# EAGLE board 6hip4081 (EAGLE 5.06)
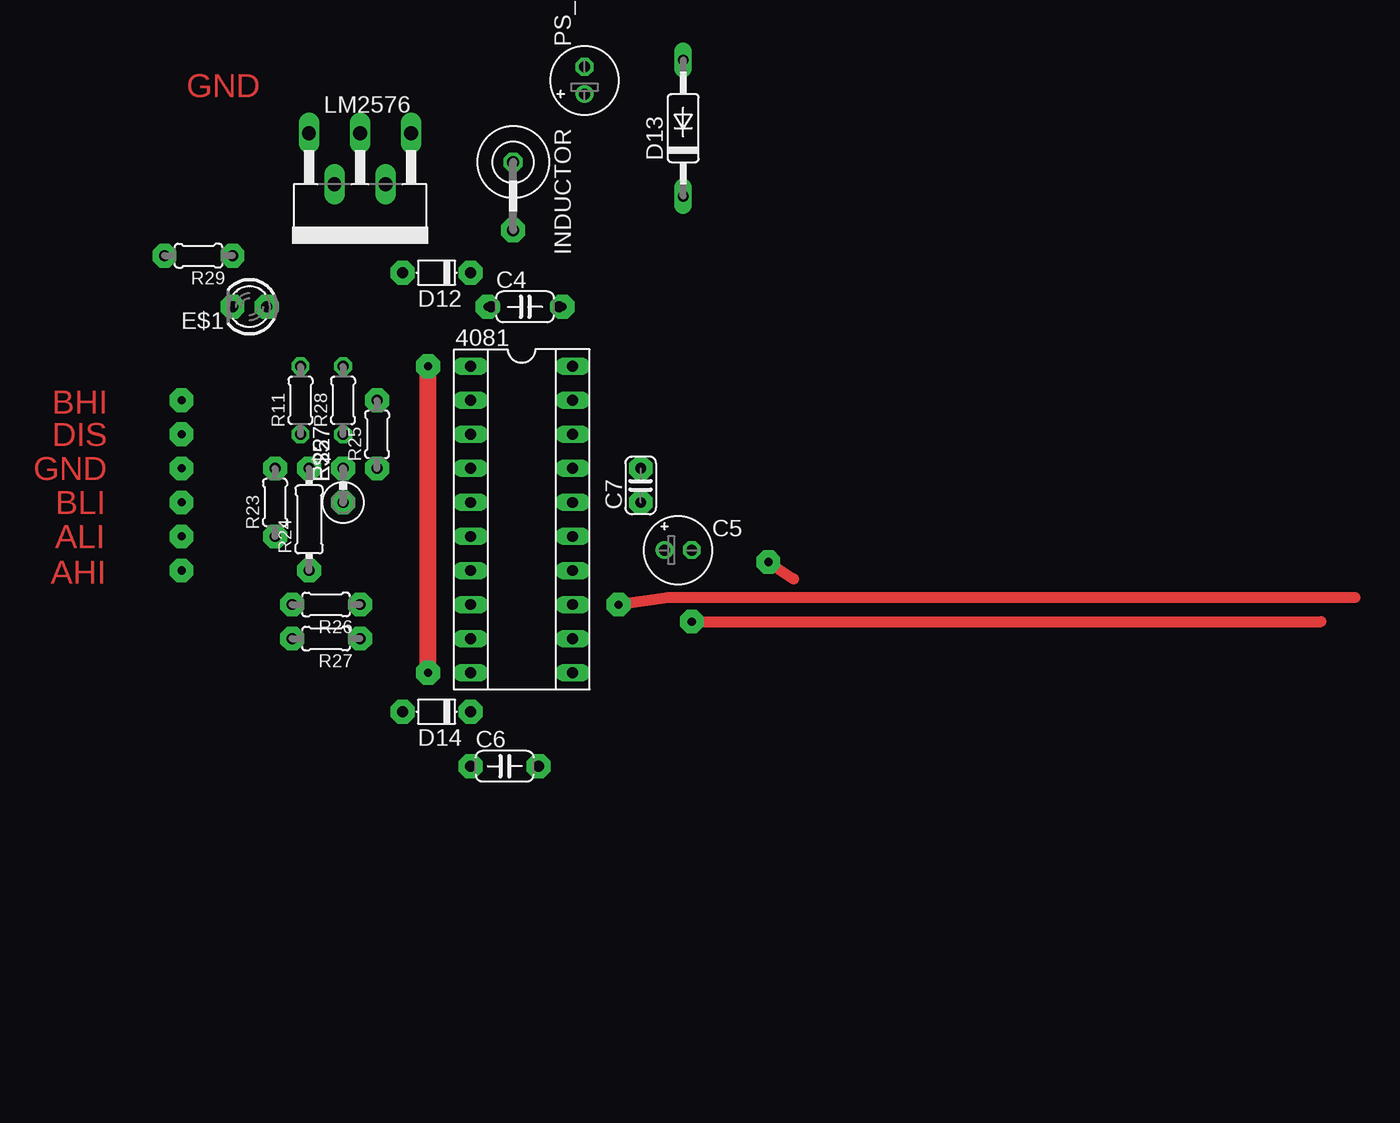
[diagram p0: board, top side]
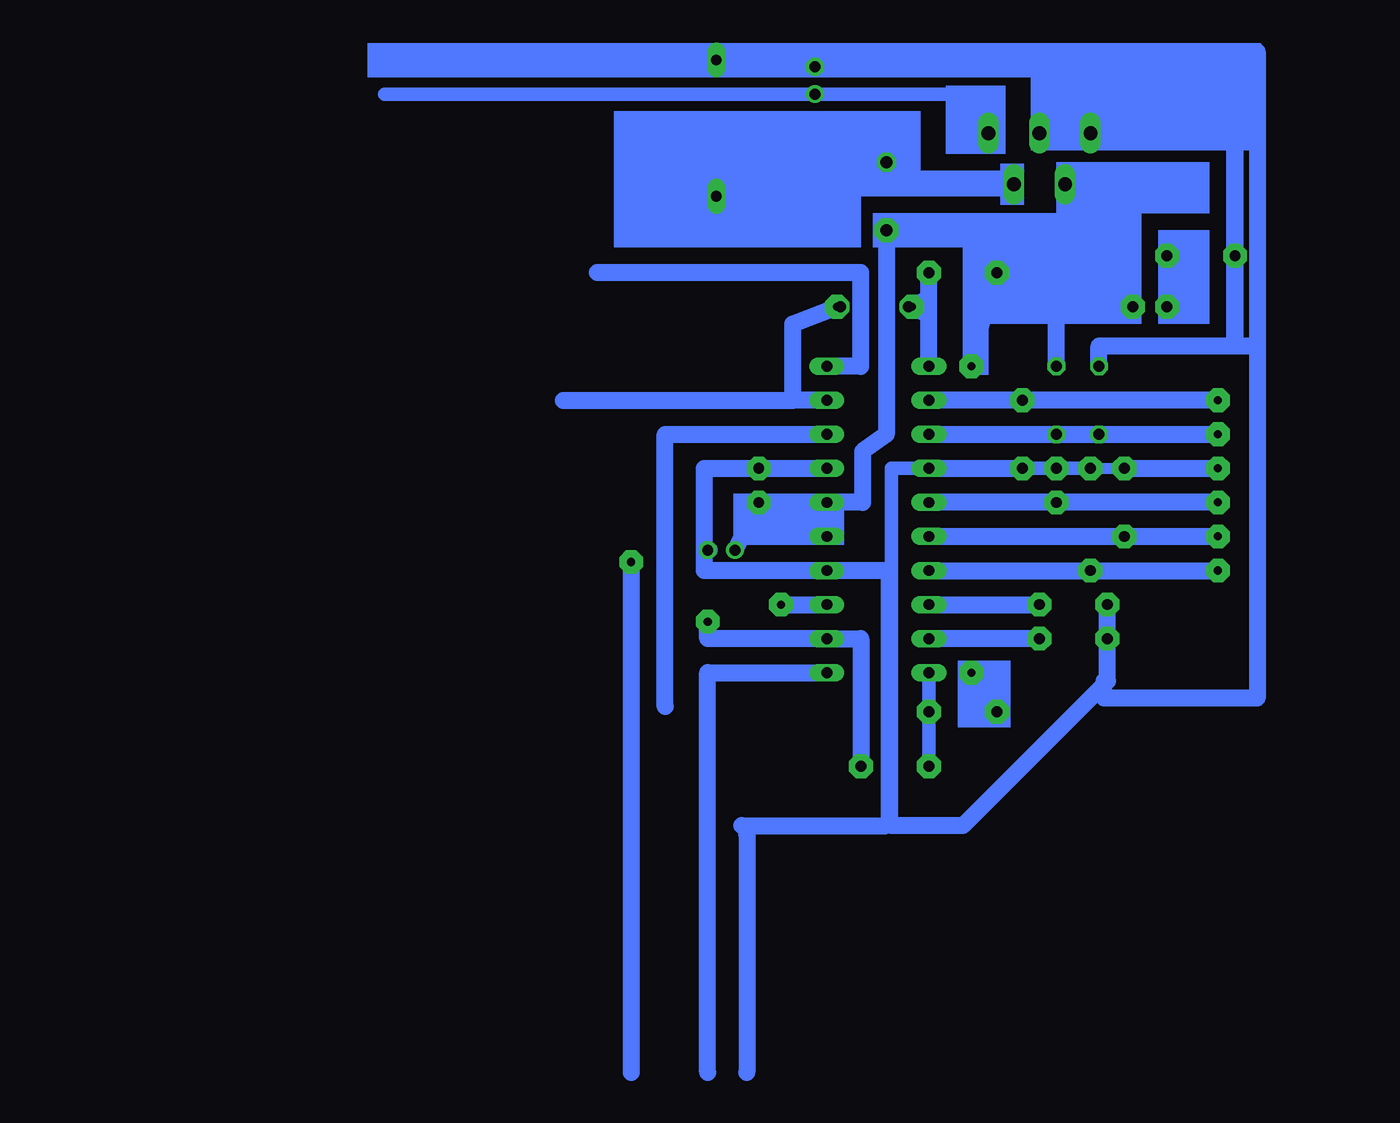
[diagram p1: board, bottom side, seen from below]

No outline drawn. Coordinates in mm, seen from the top.
Copper layers (1*16): Top 0.035mm / dielectric 1.5mm / Bottom 0.035mm
Design rules "default": minimum track width 10mil, minimum drill 24mil, track to track 8mil, track to pad 8mil, pad to pad 8mil, via to via 8mil, smd to smd 8mil, copper to edge 40mil, drill to drill 8mil, minimum pad ring 10mil, minimum via ring 8mil, stop-mask expansion 4mil, vias tented up to drill 0mil, thermal gap 10mil

## Footprints (pad centres in the part's own frame; a part is rotated, then mirrored left to right if it is on the bottom)
SOCKET-20 = drill 0.813 long: 1 -11.43,-3.81; 2 -8.89,-3.81; 3 -6.35,-3.81; 4 -3.81,-3.81; 5 -1.27,-3.81; 6 1.27,-3.81; 7 3.81,-3.81; 8 6.35,-3.81; 9 8.89,-3.81; 10 11.43,-3.81; 11 11.43,3.81; 12 8.89,3.81; 13 6.35,3.81; 14 3.81,3.81; 15 1.27,3.81; 16 -1.27,3.81; 17 -3.81,3.81; 18 -6.35,3.81; 19 -8.89,3.81; 20 -11.43,3.81
C050-024X044 = drill 0.813 octagon: 1 -2.54,0; 2 2.54,0
E2-5 = drill 0.813 pad 1.27 round: + -1.016,0 | drill 0.813 pad 1.27 octagon: - 1.016,0
C025-024X044 = drill 0.813 octagon: 1 -1.27,0; 2 1.27,0
D-5 = drill 0.813 octagon: A 2.54,0; C -2.54,0
C2992 = drill 0.813 long: A 5.08,0; C -5.08,0
LED3MM = drill 0.813 octagon: A -1.27,0; K 1.27,0
0309V = drill 0.813 octagon: 1 -1.27,0; 2 1.27,0
LBC-SE = drill 0.914 octagon: 1 -2.54,0; 2 2.54,0
CB360 = drill 1.016 long: 1 -3.81,-8.255; 2 -1.905,-4.445; 3 0,-8.255; 4 1.905,-4.445; 5 3.81,-8.255
0204/5 = drill 0.813 octagon: 1 -2.54,0; 2 2.54,0
0204/7 = drill 0.813 octagon: 1 -3.81,0; 2 3.81,0

## Placement (x,y rotation side)
4081  [SOCKET-20]  43.56,43.81 270 top
C4  [C050-024X044]  43.81,59.69 0 top
C5  330uF  [E2-5]  55.24,41.53 0 top
C6  [C050-024X044]  42.29,25.4 0 top
C7  .47uf  [C025-024X044]  52.45,46.35 90 top
D12  [D-5]  37.21,62.23 180 top
D13  [C2992]  55.63,73.03 90 top
D14  [D-5]  37.21,29.46 180 top
E$1  [LED3MM]  23.24,59.69 180 top
E$57  [0309V]  30.23,46.35 90 top
INDUCTOR  330uH  [LBC-SE]  42.93,67.94 270 top
LM2576  [CB360]  31.5,64.39 180 top
PS_CAP2  100uF  [E2-5]  48.26,76.58 90 top
R11  [0204/5]  27.05,52.7 90 top
R22  [0309V]  30.23,46.35 90 top
R23  [0204/5]  25.15,45.09 90 top
R24  [0204/7]  27.69,43.81 90 top
R25  [0204/5]  32.77,50.16 90 top
R26  [0204/5]  28.96,37.47 180 top
R27  [0204/5]  28.96,34.92 180 top
R28  [0204/5]  30.23,52.7 90 top
R29  [0204/5]  19.43,63.5 180 top

## Library data of the parts
4081 = ic-package
C4-C7 E$57 PS_CAP2 R11 R22-R29 = rcl
D12-D14 = diode
E$1 = led
INDUCTOR = inductors
LM2576 = linear

## Nets
GND2: 4081.4
R24: 4081.5
S$2: 4081.19
S$5: 4081.13
S$10: 4081.18
S$11: 4081.15 4081.16 C5.+
S$16: 4081.20
S$17: 4081.11
S$19: 4081.12
S$30: 4081.14 4081.17
S$33: 4081.10
S$34: 4081.1
S$37: INDUCTOR.1
S$38: C5.-
S$41: R11.2
S$43: R28.2
S$76: 4081.2
S$78: 4081.3
S$80: 4081.9
S$81: 4081.8
S$83: 4081.6
S$84: 4081.7

## Tracks (layer width: path | path; a pad name or v marks a point on that pad's centre or on a via)
GND2  (via drill 0.6 pad 1.78)
  Bottom 0.813: v27.69,47.62 v25.15,47.62
  Bottom 1.016: v27.69,47.62 v30.23,47.62 v32.77,47.62 | 4081.4 42.55,47.62 42.55,20.95
  Bottom 1.27: 4081.4 v32.77,47.62 | v26.42,37.47 v26.42,34.92 26.42,31.75 37.21,20.95 42.55,20.95
R24  (via drill 0.6 pad 1.78)
  Bottom 1.27: 4081.5 v30.23,45.09 v18.16,45.09
S$1
  Bottom 1.27: 15.24,78.74 15.24,30.48 26.67,30.48 26.67,31.75
S$2  (via drill 0.6 pad 1.78)
  Bottom 1.27: 67.06,52.7 49.91,52.7 | 4081.19 49.91,52.7 | 49.91,52.7 49.91,58.42 v46.61,59.69
S$3
  Bottom 1.27: 53.34,20.32 53.34,2.54
S$5  (via drill 0.6 pad 1.78)
  Top 0.813: 105.79,37.97 54.48,37.97 v50.8,37.47
  Bottom 1.27: v50.8,37.47 4081.13
S$10
  Bottom 1.27: 59.44,29.84 59.44,50.16 4081.18
S$11  (via drill 0.6 pad 1.78)
  Top 1.27: v36.58,32.38 v36.58,55.24
  Bottom 1.016: 4081.16 4081.15 | 28.96,68.58 28.96,65.41 36.58,65.41 | 36.58,65.41 42.93,65.41 | v34.67,62.23 36.58,65.41 | v34.67,62.23 36.58,64.77 | v36.58,55.24 v34.67,62.23
  Bottom 1.27: C5.+ 53.72,42.55 4081.15 4081.16 | 4081.16 v52.45,45.09 | 4081.16 44.7,45.09 44.7,48.9 42.93,50.16 42.93,65.41 | v36.58,32.38 34.67,32.38 v34.67,29.46 34.67,29.34
S$16
  Bottom 1.27: 64.52,62.23 44.83,62.23 44.83,55.24 4081.20
S$17  (via drill 0.6 pad 1.78)
  Top 0.813: v61.98,40.64 63.88,39.37
  Bottom 1.27: v61.98,40.64 61.98,2.54 | 56.26,2.54 56.26,32.38 4081.11
S$19  (via drill 0.6 pad 1.78)
  Top 0.813: v56.26,36.2 103.25,36.2
  Bottom 1.27: v56.26,36.2 56.26,34.92 4081.12 44.83,34.92 v44.83,25.4
S$24
  Bottom 1.016: 44.2,68.58 55.63,68.58
S$30  (via drill 0.6 pad 1.78)
  Bottom 0.813: 42.93,20.95 42.93,40.01
  Bottom 1.27: 53.72,20.95 42.93,20.95 | 42.93,40.01 4081.14 56.52,40.01 56.52,47.62 v52.45,47.62 4081.17
S$33  (via drill 0.6 pad 1.78)
  Bottom 1.016: v39.75,25.4 v39.75,29.46 4081.10
S$34  (via drill 0.6 pad 1.78)
  Bottom 1.27: 4081.1 39.75,60.33 v41.02,59.69 39.75,59.05 v39.75,62.23
S$37
  Bottom 1.016: INDUCTOR.1 42.93,69.22 34.04,69.22
S$38
  Bottom 1.27: C5.- 56.13,41.53
S$39  (via drill 0.6 pad 1.78)
  other vias: 42.93,65.41
S$41
  Bottom 1.27: R11.2 27.05,56.77 15.75,56.77
S$42
  Bottom 1.016: 80.39,75.56 36.58,75.56 36.58,71.75
S$43
  Bottom 1.27: 30.23,55.5 R28.2 30.23,58.67
S$44  (via drill 0.6 pad 1.78)
  Bottom 1.27: 24.51,47.62 v18.16,47.62
S$45
  Bottom 1.016: 81.03,78.74 31.5,78.74 31.5,71.75
S$46  (via drill 0.6 pad 1.78)
  other vias: 24.51,59.69
S$47  (via drill 0.6 pad 1.78)
  other vias: 21.97,59.69
S$48  (via drill 0.6 pad 1.78)
  other vias: 21.97,63.5
S$49  (via drill 0.6 pad 1.78)
  other vias: 16.89,63.5
S$76  (via drill 0.6 pad 1.78)
  Bottom 1.27: 4081.2 v32.77,52.7 v18.16,52.7
S$78  (via drill 0.6 pad 1.78)
  Bottom 1.27: 4081.3 v18.16,50.16
S$80  (via drill 0.6 pad 1.78)
  Bottom 1.27: v31.5,34.92 4081.9
S$81  (via drill 0.6 pad 1.78)
  Bottom 1.27: 4081.8 v31.5,37.47
S$83  (via drill 0.6 pad 1.78)
  Bottom 1.27: 4081.6 v25.15,42.55 v18.16,42.55
S$84  (via drill 0.6 pad 1.78)
  Bottom 1.27: 4081.7 v27.69,40.01 v18.16,40.01
(copper drawn outside any net)
  shapes: Bottom area x20

## Text on the board
Top: GND | BHI | DIS | GND | BLI | ALI | AHI